# Altium PCB BACK_UP_02_10_Analizador_de_espectro.PcbDoc
Units mm, origin at the board's own origin, x right, y up, seen from the top; angles counter-clockwise.
Board outline 152.4 x 101.6 mm, 2 copper layers (Top Layer, Bottom Layer); 140 components, 98 nets, 608 pads, 72 vias.
Unrouted connection lines stored in the file: 220.
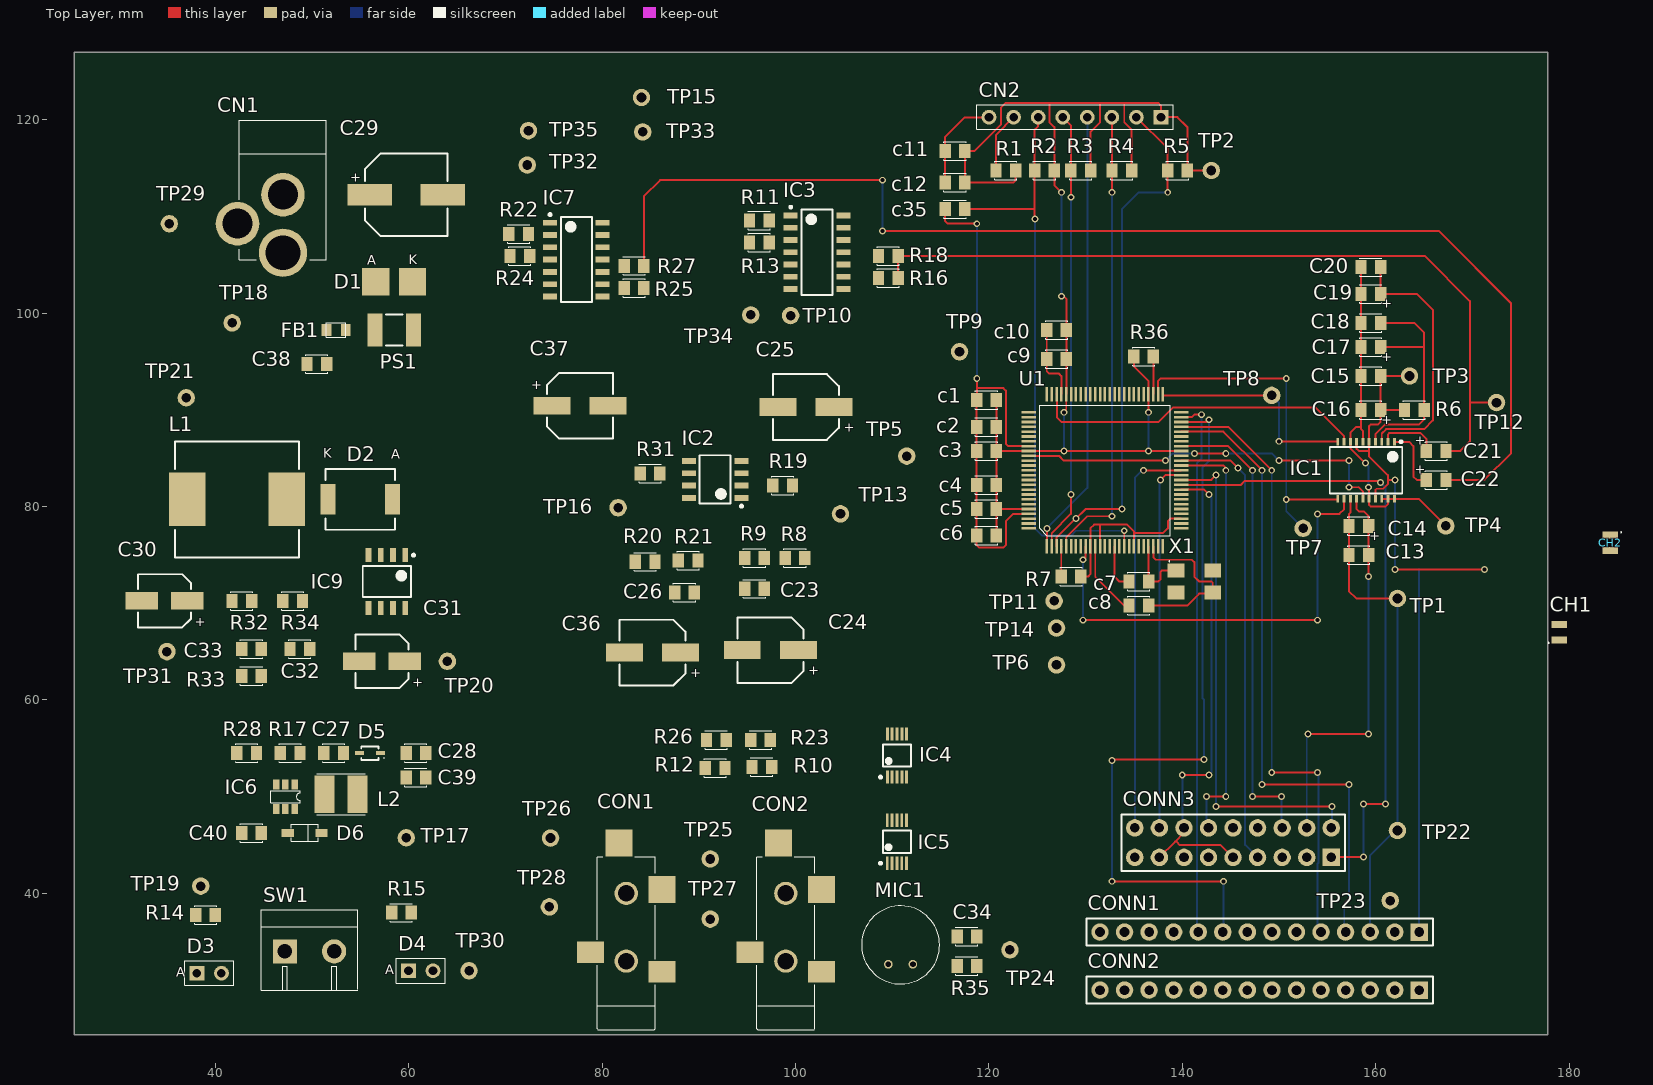
[diagram p0: Top Layer view]
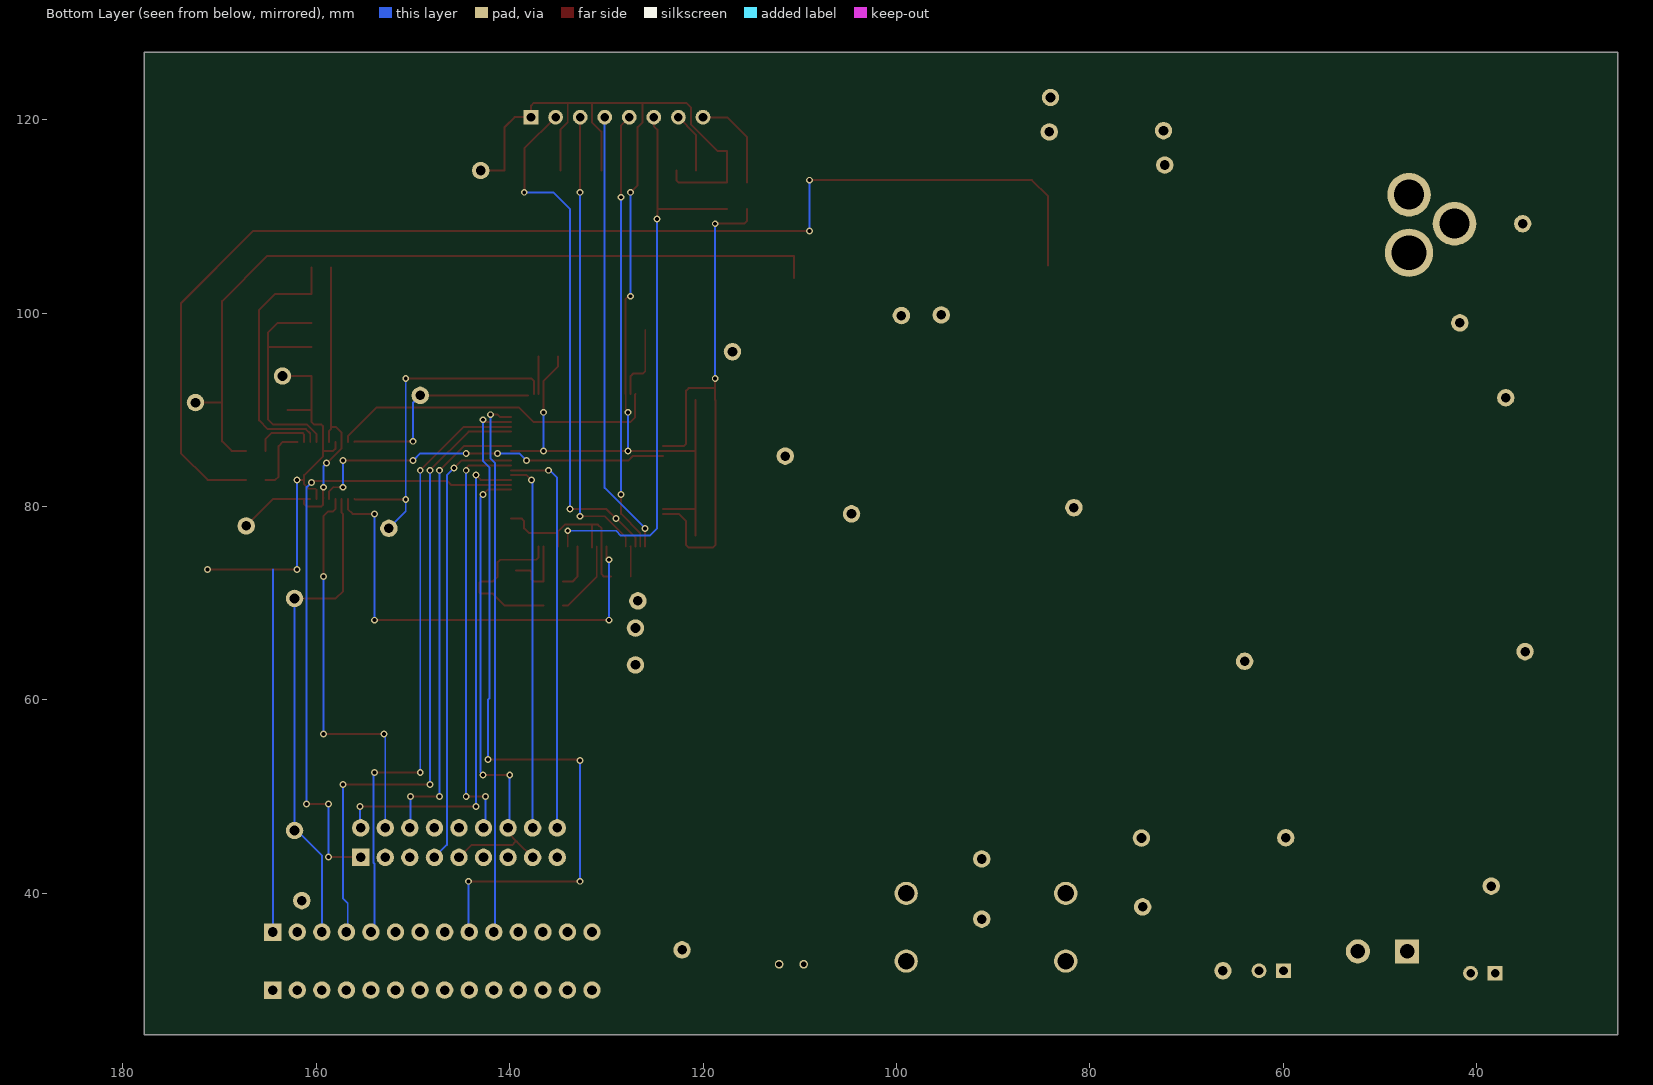
[diagram p1: Bottom Layer view, seen from below]

## Layer stack, top to bottom
Top Solder: solder mask 0.0102, Solder Resist, Dk 3.5
Top Layer: signal copper 0.0356
Dielectric 1: dielectric 0.32, FR-4, Dk 4.8
Bottom Layer: signal copper 0.0356
Bottom Solder: solder mask 0.0102, Solder Resist, Dk 3.5

## Board outline
25.4,25.4 177.8,25.4 177.8,127 25.4,127

## Design rules (kind name [scope] priority, off if disabled: settings)
Clearance [All] p1: gap=0.2
PolygonConnect [All] p1: connectstyle=Relief reliefconductorwidth=0.254 reliefentries=4 polygonreliefangle="90 Angle" airgapwidth=0.254
RoutingVias [All] p1: holewidth=0.406 width=0.711 viastyle="Through Hole" minholewidth=0.406 minwidth=0.711 maxholewidth=0.406 maxwidth=0.711
SolderMaskExpansion [All] p1: expansion=0.102
Width [All] p1: maxlimit=6.35 minlimit=0.203 preferedwidth=0.203
30 further rules are at their usual default settings.

## Classes and differential pairs
component class U_adc: C13 C14 C15 C16 C17 C18 C19 C20 C21 C22 IC1 R6 TP1 TP2 TP3 TP4 TP5 TP6 TP7 TP8 TP9 TP10
component class U_AGC: C23 C24 C25 C26 C36 C37 IC2 IC3 IC4 IC7 R8 R9 R10 R11 R12 R13 R16 R18 R19 R20 R21 R22 R23 R24 R25 R26 R27 R31 TP11 TP12 TP13 TP14 TP15 TP16 TP32 TP33 TP34 TP35
component class U_Fuente: C27 C28 C29 C30 C31 C32 C33 C38 C39 C40 CH1 CH2 CN1 D1 D2 D3 D4 D5 D6 FB1 IC6 IC9 L1 L2 PS1 R14 R15 R17 R28 R32 R33 R34 SW1 TP17 TP18 TP19 TP20 TP21 TP29 TP30 TP31
component class U_Signal_imputs: C34 CON1 CON2 IC5 MIC1 R35 TP22 TP23 TP24 TP25 TP26 TP27 TP28
component class U_uc: c1 c2 c3 c4 c5 c6 c7 c8 c9 c10 c11 c12 c35 CN2 CONN1 CONN2 CONN3 R1 R2 R3 R4 R5 R7 R36 U1 X1

## Components (designator, comment, footprint, x,y, rotation, side; value= is the part's Value field where it differs from the comment)
c1 "100nF 25V X7R Ceramic" C_0805 119.75,91 r180 top
c2 "100nF 25V X7R Ceramic" C_0805 119.75,88.25 r180 top
c3 "100nF 25V X7R Ceramic" C_0805 119.75,85.75 r180 top
c4 "100nF 25V X7R Ceramic" C_0805 119.75,82.25 r180 top
c5 "100nF 25V X7R Ceramic" C_0805 119.75,79.75 r180 top
c6 "100nF 25V X7R Ceramic" C_0805 119.75,77 r180 top
c7 "18pF 50V COG Ceramic" C_0805 135.5,72.25 r0 top
c8 "18pF 50V COG Ceramic" C_0805 135.5,69.75 r0 top
c9 "1uF 6V3 X7R Ceramic" C_0805 127,95.25 r180 top
c10 "10nF 25V X7R Ceramic" C_0805 127,98.25 r180 top
c11 "10nF 25V X7R Ceramic" C_0805 116.5,116.75 r180 top
c12 "100nF 25V X7R Ceramic" C_0805 116.5,113.5 r180 top
C13 "100nF 16V Ceramic" C_0805 158.25,75 r0 top
C14 "10uF 6V3 Tantalium" C_0805_POL 158.25,78 r180 top
C15 "100nF 16V Ceramic" C_0805 159.5,93.5 r0 top
C16 "10uF 6V3 Tantalium" C_0805_POL 159.5,90 r180 top
C17 "10uF 6V3 Tantalium" C_0805_POL 159.5,96.5 r180 top
C18 "100nF 16V Ceramic" C_0805 159.5,99 r0 top
C19 "10uF 6V3 Tantalium" C_0805_POL 159.5,102 r180 top
C20 "100nF 16V Ceramic" C_0805 159.5,104.75 r0 top
C21 "1uF 16V Tantalium" C_0805_POL 166.25,85.75 r0 top
C22 "1uF 16V Tantalium" C_0805_POL 166.25,82.75 r0 top
C23 "1uF 16V Ceramic" C_0805 95.758,71.501 r180 top
C24 "100uF 16V Elect. Alum." C_AE7066X54M 97.409,65.151 r180 top
C25 "100uF 16V Elect. Alum." C_AE7066X54M 101.092,90.297 r180 top
C26 "1uF 16V Ceramic" C_0805 88.519,71.12 r0 top
C27 "100nF 16V X7R" C_0805 52.25,54.5 r180 top
C28 "10uF 10V X7R" C_0805 60.75,54.5 r0 top
C29 "100uF 50V ElecAlum" C_AE10083X105M 59.75,112.25 r0 top
C30 "100uF 6V3 ElecAlum" C_AE6553X54M 34.75,70.25 r180 top
C31 "4.7uF 50V ElecAlum" C_AE6553X54M 57.25,64 r180 top
C32 "15nF 50V Ceramic" C_0805 48.75,65.25 r0 top
C33 "100pF 25V Ceramic" C_0805 43.75,65.25 r180 top
C34 "2.2u 6V3 X5R Ceramic" C_0805 117.729,35.56 r0 top
c35 "100nF 25V X7R Ceramic" C_0805 116.5,110.75 r180 top
C36 "100uF 16V Elect. Alum." C_AE7066X54M 85.217,64.897 r180 top
C37 "100uF 16V Elect. Alum." C_AE7066X54M 77.724,90.424 r0 top
C38 "100nF 35V Ceramic" C_0805 50.5,94.75 r180 top
C39 "10uF 10V X7R" C_0805 60.75,52 r0 top
C40 "2.2uF 50V X7R" C_0805 43.75,46.25 r0 top
CH1 "Choke" I_CHOQUE_DFN 179,67 r90 top
CH2 "Choke" I_CHOQUE_DFN 184.25,76.25 r270 top
CN1 "DC Jack" Jack_PJ002A 47,106.25 r90 top
CN2 "CONN_82" HDR_M_08P_0.1 128.905,120.269 r180 top
CON1 "AUD_IN" "AUDIO_JACK 3.5mm SMD" 82.5,36.5 r90 top
CON2 "AUD_IN" "AUDIO_JACK 3.5mm SMD" 99,36.5 r90 top
CONN1 "CON_14" "1x14x2.54 Pin Header TH V" 148,36 r180 top
CONN2 "CON_14" "1x14x2.54 Pin Header TH V" 148,30 r180 top
CONN3 "CON_18" "2x9x2.54 Pin Header TH V" 145.25,45.25 r180 top
D1 "CDBA140-G" D_DO-214AC_SCHOTTKY 58.5,103.25 r0 top
D2 "STPS3L40" D_M6959X25N 55,80.75 r180 top
D3 "LED" LED_TH 39.37,31.75 r0 top
D4 "LED" LED_TH 61.25,32 r0 top
D5 "1N4148WS" 1N4148WS 56,54.5 r180 top
D6 "MBRX160TP" SOD_123 49.25,46.25 r180 top
FB1 "Ferrite Bead" Ferrite_bead 53.5,98.25 r180 top
IC1 "PCM1802" SSOP_DB20 159,83.75 r270 top
IC2 "MCP6022" SOIC_D8 91.694,82.804 r180 top
IC3 "74LVC4066" SO14 102.235,106.299 r0 top
IC4 "TS5A23157" TSSOP50P490X110-10N 110.5,54.25 r90 top
IC5 "TS5A23157" TSSOP50P490X110-10N 110.49,45.339 r90 top
IC6 "MCP" SOT23_6P 47.25,50 r180 top
IC7 "74LVC4066" SO14 77.343,105.537 r0 top
IC9 "L5972D" SO8 57.75,72.25 r270 top
L1 "47uH" I_P128122X60N 16.5,94.5 r180 top
L2 "LQH44PN220MP0L" VLCF5028 53,50.25 r0 top
MIC1 "Mic" MIC_CMA-4544PF-W 110.871,34.671 r270 top
PS1 "Polyswitch" POLISWITCH_1 58.5,98.25 r180 top
R1 "10k 5% 1/8W" R_0805 121.75,114.75 r0 top
R2 "10k 5% 1/8W" R_0805 125.75,114.75 r0 top
R3 "10k 5% 1/8W" R_0805 129.5,114.75 r0 top
R4 "10k 5% 1/8W" R_0805 133.75,114.75 r0 top
R5 "10k 5% 1/8W" R_0805 139.5,114.75 r0 top
R6 "1k 1/8W" R_0805 164,90 r0 top
R7 "10k 5% 1/8W" R_0805 128.5,72.75 r0 top
R8 "100k 1/8W" R_0805 99.949,74.676 r0 top
R9 "100k 1/8W" R_0805 95.758,74.676 r0 top
R10 "100k 1/8W" R_0805 96.52,53.086 r180 top
R11 "590 1/8W" R_0805 96.266,109.601 r0 top
R12 "33k 1/8W" R_0805 91.694,52.959 r180 top
R13 "2k2 1/8W" R_0805 96.266,107.315 r0 top
R14 "Res1" R_0805 39,37.75 r180 top
R15 "Res1" R_0805 59.25,38 r180 top
R16 "3k9 1/8W" R_0805 109.601,103.632 r180 top
R17 "30k9 1%" R_0805 47.75,54.5 r0 top
R18 "100k 1/8W" R_0805 109.601,105.918 r180 top
R19 "1k 1/8W" R_0805 98.679,82.169 r0 top
R20 "100k 1/8W" R_0805 84.455,74.295 r180 top
R21 "100k 1/8W" R_0805 88.9,74.422 r180 top
R22 "590 1/8W" R_0805 71.374,108.204 r0 top
R23 "100k 1/8W" R_0805 96.393,55.88 r180 top
R24 "2k2 1/8W" R_0805 71.501,105.918 r0 top
R25 "3k9 1/8W" R_0805 83.312,102.616 r180 top
R26 "33k 1/8W" R_0805 91.821,55.88 r180 top
R27 "100k 1/8W" R_0805 83.312,104.902 r180 top
R28 "30k9 1%" R_0805 43.25,54.5 r0 top
R31 "1k 1/8W" R_0805 84.963,83.439 r180 top
R32 "8k2 1/4W" R_0805 42.75,70.25 r0 top
R33 "10k 1/4W" R_0805 43.75,62.5 r0 top
R34 "5k1 1/4W" R_0805 48,70.25 r180 top
R35 "2k2 1/8W" R_0805 117.729,32.512 r0 top
R36 "10k 5% 1/8W" R_0805 136,95.5 r180 top
SW1 "Switch" BORNERA_2X5MM 49.75,34 r180 top
TP1 "TP" TP 162.25,70.5 r0 top
TP2 "TP" TP 143,114.75 r0 top
TP3 "TP" TP 163.5,93.5 r0 top
TP4 "TP" TP 167.25,78 r0 top
TP5 "TP" TP 111.506,85.217 r0 top
TP6 "TP" TP 127,63.627 r0 top
TP7 "TP" TP 152.5,77.75 r0 top
TP8 "TP" TP 149.25,91.5 r0 top
TP9 "TP" TP 116.967,96.012 r0 top
TP10 "TP" TP 99.5,99.75 r90 top
TP11 "TP" TP 126.75,70.25 r0 top
TP12 "TP" TP 172.5,90.75 r90 top
TP13 "TP" TP 104.648,79.248 r90 top
TP14 "TP" TP 127,67.437 r90 top
TP15 "TP" TP 84.074,122.301 r90 top
TP16 "TP" TP 81.661,79.883 r90 top
TP17 "TP" TP 59.75,45.75 r90 top
TP18 "TP" TP 41.75,99 r90 top
TP19 "TP" TP 38.5,40.75 r90 top
TP20 "TP" TP 64,64 r90 top
TP21 "TP" TP 37,91.25 r0 top
TP22 "TP" TP 162.25,46.5 r90 top
TP23 "TP" TP 161.5,39.25 r90 top
TP24 "TP" TP 122.174,34.163 r90 top
TP25 "TP" TP 91.186,43.561 r90 top
TP26 "TP" TP 74.676,45.72 r90 top
TP27 "TP" TP 91.186,37.338 r90 top
TP28 "TP" TP 74.549,38.608 r90 top
TP29 "TP" TP 35.25,109.25 r90 top
TP30 "TP" TP 66.25,32 r90 top
TP31 "TP" TP 35,65 r0 top
TP32 "TP" TP 72.263,115.316 r90 top
TP33 "TP" TP 84.201,118.745 r90 top
TP34 "TP" TP 95.377,99.822 r90 top
TP35 "TP" TP 72.39,118.872 r90 top
U1 "LPC1769FBD100" LQFP100 132,83.75 r0 top
X1 "XTAL_HF" ABMC_XTAL 141.25,72.25 r0 top

## Footprints (in the part's own frame and the unit in brackets; to place one, negate y for a bottom-side part, rotate by r counter-clockwise, add the part's x,y. Pads: shape width x height; smd on the part's side, far side on the other; paste and mask are expansions set on the pad)
1N4148WS [mm] "SODFL, 2-Leads, Body 1.25x2.50mm, IPC Medium Density"
  rect 0.95x0.4 smd: 1(-1.075,0) 2(1.075,0)
  silkscreen extent -1.5,-0.7 0.9,0.7, body extent -0.9,-0.67 0.9,0.67, height 0.9
"1x14x2.54 Pin Header TH V" [mm] "1x14x2.54 Pin Header TH V"
  rect 1.8x1.8 hole 1: 1(-16.51,0)
  round 1.8 hole 1: 2(-13.97,0) 3(-11.43,0) 4(-8.89,0) 5(-6.35,0) 6(-3.81,0) 7(-1.27,0) 8(1.27,0) 9(3.81,0) 10(6.35,0) 11(8.89,0) 12(11.43,0) 13(13.97,0) 14(16.51,0)
  silkscreen extent -17.91,-1.4 17.91,1.4
"2x9x2.54 Pin Header TH V" [mm] "2x9x2.54 Pin Header TH V"
  rect 1.8x1.8 hole 1: 1(-10.16,1.524)
  round 1.8 hole 1: 2(-7.62,1.524) 3(-5.08,1.524) 4(-2.54,1.524) 5(0,1.524) 6(2.54,1.524) 7(5.08,1.524) 8(7.62,1.524) 9(10.16,1.524) 10(-10.16,-1.524) 11(-7.62,-1.524) 12(-5.08,-1.524) 13(-2.54,-1.524) 14(0,-1.524) 15(2.54,-1.524) 16(5.08,-1.524) 17(7.62,-1.524) 18(10.16,-1.524)
  silkscreen extent -11.56,-2.92 11.56,2.92
ABMC_XTAL [mm] "ABM3C-12.000MHZ-D4Y-T"
  rect 1.75x1.45 smd: 1(-1.9,1.15) 2(-1.9,-1.15) 3(1.9,-1.15) 4(1.9,1.15)
  silkscreen extent -2.62,2.03 -2.53,2.12, body extent -2.58,-1.68 2.57,1.68, height 1.3
"AUDIO_JACK 3.5mm SMD" [mm] "SJ-3524-SMT"
  rect 2.8x2.8 smd: 1(3.9,-3.7) 2(8.7,0.75)
  rect 2.2x2.8 smd: 3(-2.6,3.7) 4(-4.6,-3.7)
  round 2.4 hole 1.7: ""(-3.5,0) ""(3.5,0)
  silkscreen extent -10.6,-3 7.3,3
BORNERA_2X5MM [mm]
  rect 2.5x2.5 hole 1.5: 1(2.54,0)
  round 2.5 hole 1.5: 2(-2.54,0)
  silkscreen extent -5,-4.3 5,4
C_0805 [mm]
  rect 0.5x1.25 on Mech3: 0(-0.75,0) 0(0.75,0)
  rect 1.175x1.45 smd: 1(-1.016,0) 2(1.016,0)
  silkscreen extent -1.14,-0.95 1.14,0.95
C_0805_POL [mm]
  rect 0.5x1.25 on Mech3: 0(-0.75,0) 0(0.75,0)
  rect 1.175x1.45 smd: 1(-1.016,0) 2(1.016,0)
  silkscreen extent -1.14,-0.95 1.14,0.95
C_AE6553X54M [mm] "Aluminum Electrolytic Capacitor, 4.7uF, 50V"
  rect 3.35x1.8 smd: 1(-2.35,0) 2(2.35,0)
  silkscreen extent -2.75,-2.75 2.75,2.75, body extent -2.75,-2.75 2.75,2.75, height 5.4
C_AE7066X54M [mm] "Aluminum Electrolytic Capacitor, 100uF, 16V"
  rect 3.8x1.85 smd: 1(-2.9,0) 2(2.9,0)
  silkscreen extent -3.4,-3.4 3.4,3.4, body extent -3.4,-3.4 3.4,3.4, height 5.4
C_AE10083X105M [mm] "Aluminum Electrolytic Capacitor, 100uF, 50V"
  rect 4.6x2.25 smd: 1(-3.775,0) 2(3.775,0)
  silkscreen extent -4.25,-4.25 4.25,4.25, body extent -4.25,-4.25 4.25,4.25, height 10.5
D_DO-214AC_SCHOTTKY [mm] "CDBA140-G"
  rect 2.8x2.8 smd: 1(-1.9,0) 2(1.9,0)
  body extent -2.25,-1.4 2.25,1.39, height 2.29
D_M6959X25N [mm] "Diodo STPS3L40-Y"
  rect 1.54x3.14 smd: 1(-3.325,0) 2(3.325,0)
  silkscreen extent -3.6,-3.15 3.6,3.15, body extent -3.57,-3.13 3.57,3.13, height 2.45
Ferrite_bead [mm]
  rect 1x1.25 smd: 1(0,0) 2(2,0)
  silkscreen extent 0,-0.75 2,0.75
HDR_M_08P_0.1 [mil]
  rect 60x60 hole 35: 1(-350,0)
  round 60 hole 35: 2(-250,0) 3(-150,0) 4(-50,0) 5(50,0) 6(150,0) 7(250,0) 8(350,0)
  silkscreen extent -400,-50 400,50
I_CHOQUE_DFN [mm] "Chip Power Inductor BRC2012T2R2MD"
  rect 0.75x1.6 smd: 1(-0.8,0) 2(0.8,0)
  silkscreen extent -1.15,1.07 -1.05,1.17, body extent -1.1,-0.72 1.1,0.72, height 1.4
I_P128122X60N [mm] "Inductor SMD 744771147"
  rect 3.8x5.5 smd: 1(-30.9,13.75) 2(-20.6,13.75)
  silkscreen extent -32.15,7.75 -19.35,19.75, body extent -32.15,7.75 -19.35,19.75, height 6
Jack_PJ002A [mm]
  round 5 hole 3.6: 1(0,0)
  round 4.5 hole 3.1: 2(6,0) 3(3,4.7)
  silkscreen extent -0.75,-4.5 13.7,4.5
LED_TH [mil]
  rect 60x60 hole 35 paste+0: 1(-50,0)
  round 60 hole 35 paste+0: 2(50,0)
  silkscreen extent -100,-50 100,50
LQFP100 [mm]
  rect 0.27x1.5 smd: 1(-6,-7.875) 2(-5.5,-7.875) 3(-5,-7.875) 4(-4.5,-7.875) 5(-4,-7.875) 6(-3.5,-7.875) 7(-3,-7.875) 8(-2.5,-7.875) 9(-2,-7.875) 10(-1.5,-7.875) 11(-1,-7.875) 12(-0.5,-7.875) 13(0,-7.875) 14(0.5,-7.875) 15(1,-7.875) 16(1.5,-7.875) 17(2,-7.875) 18(2.5,-7.875) 19(3,-7.875) 20(3.5,-7.875) 21(4,-7.875) 22(4.5,-7.875) 23(5,-7.875) 24(5.5,-7.875) 25(6,-7.875) 51(6,7.875) 52(5.5,7.875) 53(5,7.875) 54(4.5,7.875) 55(4,7.875) 56(3.5,7.875) 57(3,7.875) 58(2.5,7.875) 59(2,7.875) 60(1.5,7.875) 61(1,7.875) 62(0.5,7.875) 63(0,7.875) 64(-0.5,7.875) 65(-1,7.875) 66(-1.5,7.875) 67(-2,7.875) 68(-2.5,7.875) 69(-3,7.875) 70(-3.5,7.875) 71(-4,7.875) 72(-4.5,7.875) 73(-5,7.875) 74(-5.5,7.875) 75(-6,7.875)
  rect 1.5x0.27 smd: 26(7.875,-6) 27(7.875,-5.5) 28(7.875,-5) 29(7.875,-4.5) 30(7.875,-4) 31(7.875,-3.5) 32(7.875,-3) 33(7.875,-2.5) 34(7.875,-2) 35(7.875,-1.5) 36(7.875,-1) 37(7.875,-0.5) 38(7.875,0) 39(7.875,0.5) 40(7.875,1) 41(7.875,1.5) 42(7.875,2) 43(7.875,2.5) 44(7.875,3) 45(7.875,3.5) 46(7.875,4) 47(7.875,4.5) 48(7.875,5) 49(7.875,5.5) 50(7.875,6) 76(-7.875,6) 77(-7.875,5.5) 78(-7.875,5) 79(-7.875,4.5) 80(-7.875,4) 81(-7.875,3.5) 82(-7.875,3) 83(-7.875,2.5) 84(-7.875,2) 85(-7.875,1.5) 86(-7.875,1) 87(-7.875,0.5) 88(-7.875,0) 89(-7.875,-0.5) 90(-7.875,-1) 91(-7.875,-1.5) 92(-7.875,-2) 93(-7.875,-2.5) 94(-7.875,-3) 95(-7.875,-3.5) 96(-7.875,-4) 97(-7.875,-4.5) 98(-7.875,-5) 99(-7.875,-5.5) 100(-7.875,-6)
  silkscreen extent -6.75,-6.75 6.75,6.75
MIC_CMA-4544PF-W [mm] "CMA-4544PF-W"
  round 0.9 hole 0.6: 1(2,1.27) 2(2,-1.27)
  silkscreen extent -4.04,-4.03 4.04,4.04
POLISWITCH_1 [mm]
  rect 1.55x3.4 smd: 1(-2,0) 2(2,0)
  silkscreen extent -0.85,-1.6 0.85,1.6, body extent -2.42,-1.71 2.41,1.71, height 0.85
R_0805 [mm]
  rect 0.4x1.25 on Mech3: 0(-0.8,0) 0(0.8,0)
  rect 1.175x1.45 smd: 1(-1.016,0) 2(1.016,0)
  silkscreen extent -1.14,-0.95 1.14,0.95
SO8 [mm] "Switching Regulator L5972D"
  rect 1.45x0.6 smd: 1(-2.725,1.905) 2(-2.725,0.635) 3(-2.725,-0.635) 4(-2.725,-1.905) 5(2.725,-1.905) 6(2.725,-0.635) 7(2.725,0.635) 8(2.725,1.905)
  silkscreen extent -2.85,-2.5 1.6,2.88, body extent -2,-2.5 2,2.5, height 1.75
SO14 [mm] "Quad_Bilateral_Switch 74LVC4066"
  rect 1.45x0.6 smd: 1(-2.725,3.81) 2(-2.725,2.54) 3(-2.725,1.27) 4(-2.725,0) 5(-2.725,-1.27) 6(-2.725,-2.54) 7(-2.725,-3.81) 8(2.725,-3.81) 9(2.725,-2.54) 10(2.725,-1.27) 11(2.725,0) 12(2.725,1.27) 13(2.725,2.54) 14(2.725,3.81)
  silkscreen extent -2.85,-4.4 1.6,4.78, body extent -2,-4.4 2,4.4, height 1.75
SOD_123 [mm]
  rect 1.25x0.8 smd: 1(1.75,0) 2(-1.75,0)
  silkscreen extent -1.38,-0.88 1.38,0.88
SOIC_D8 [mm] "MCP6022"
  rect 1.45x0.6 smd: 1(-2.725,1.905) 2(-2.725,0.635) 3(-2.725,-0.635) 4(-2.725,-1.905) 5(2.725,-1.905) 6(2.725,-0.635) 7(2.725,0.635) 8(2.725,1.905)
  silkscreen extent -2.85,-2.5 1.6,2.88, body extent -2,-2.5 2,2.5, height 1.75
SOT23_6P [mil]
  rect 27x40 smd: 1(-37.5,-50) 2(0,-50) 3(37.5,-50) 4(37.5,50) 5(0,50) 6(-37.5,50)
  silkscreen extent -60,-25 60,25
SSOP_DB20 [mm] "PCM1802 Single-Ended Analog-Input 24-Bit"
  rect 0.75x0.3 smd: 1(-2.95,2.925) 2(-2.95,2.275) 3(-2.95,1.625) 4(-2.95,0.975) 5(-2.95,0.325) 6(-2.95,-0.325) 7(-2.95,-0.975) 8(-2.95,-1.625) 9(-2.95,-2.275) 10(-2.95,-2.925) 11(2.95,-2.925) 12(2.95,-2.275) 13(2.95,-1.625) 14(2.95,-0.975) 15(2.95,-0.325) 16(2.95,0.325) 17(2.95,0.975) 18(2.95,1.625) 19(2.95,2.275) 20(2.95,2.925)
  silkscreen extent -3.07,-3.75 2.4,3.75, body extent -2.8,-3.75 2.8,3.75, height 2
TP [mm]
  round 1.8 hole 1: 1(0,0)
TSSOP50P490X110-10N [mm] "TSSOP, 10-Leads, Body 3.00x3.00mm, Pitch 0.50mm, IPC Medium Density"
  rect 1.35x0.3 smd: 1(-2.225,1) 2(-2.225,0.5) 3(-2.225,0) 4(-2.225,-0.5) 5(-2.225,-1) 6(2.225,-1) 7(2.225,-0.5) 8(2.225,0) 9(2.225,0.5) 10(2.225,1)
  silkscreen extent -2.35,-1.45 1.15,1.82, body extent -1.55,-1.45 1.55,1.45, height 1.1
VLCF5028 [mm]
  rect 2.1x3.9 smd: 1(-1.7,0) 2(1.7,0)
  silkscreen extent -2.5,-2.12 2.5,2.12

## Part data
c1 c2 c3 c4 c5 c6 c7 c8 c9 c10 c11 c12 C13 C15 C18 C20 C23 C26 C27 C28 C32 C33 C34 c35 C38 C39 C40: library part Cap1, "Capacitor"
C14 C16 C17 C19 C21 C22 C24 C25 C29 C30 C31 C36 C37: library part Cap_Elec, "Capacitor"
CN1: library part Barrel_jack, "Connector"
CON1 CON2: library part Jack_1
CONN1 CONN2: "CONN TFT 3.5"
CONN3: "CON_TFT_2.8"
D1: library part Diodo_Schottky, "Diodo Schottky"
D2: library part DIODO, "Diode"
D5: library part DIODO, "Diode signal"
D6: library part Diodo_Schottky
IC2: library part OpAmp_Dual
IC3 IC7: library part Q_B_Switch_2
IC4 IC5: library part A_SW_2x2:1_VSSOP, "Analog Switch"
IC6: library part "Sw Source", "Switching Source"
IC9: "Fuente Switching"
L1 L2: library part Inductor, "Inductor"
MIC1: "Microfono"
PS1: library part Poliswitch, "Polishwitch"
R1 R2 R3 R4 R5 R6 R7 R8 R9 R10 R11 R12 R13 R16 R17 R18 R19 R20 R21 R22 R23 R24 R25 R26 R27 R28 R31 R32 R33 R34 R35 R36: library part Res1, "Resistor"
R14 R15: "Resistor"
SW1: library part SW
TP1 TP2 TP3 TP4 TP5 TP6 TP7 TP8 TP9 TP10 TP11 TP12 TP13 TP14 TP15 TP16 TP17 TP18 TP19 TP20 TP21 TP22 TP23 TP24 TP25 TP26 TP27 TP28 TP29 TP30 TP31 TP32 TP33 TP34 TP35: library part "Test Point", "Test Point"
U1: library part LPC1768FBD100, "CPU Cortex M3"
X1: "Crystal"

## Via types
v1: diameter 0.711, hole 0.406, Top Layer to Bottom Layer, 72 vias

## Nets (pads, with @x,y where several pads share a name; then routed paths per layer and width w, separated by ;. In a path a pad name is that pad's centre, name@x,y a point inside that pad or via, vN(x,y) a via of type N, cw(c..) or ccw(c..) an arc to the next point about the centre after c; other vN are vias at no path point)
+5V: C15.2 C16.1 C23.1 C26.1 C28.1 C39.1 CONN1.1 D5.1 IC1.5 IC1.7 IC1.17 IC2.8 IC3.14 IC7.14 L2.2 R6.1 R8.2 R17.2 R20.2 R35.2 TP3.1 TP17.1 | length 79.7
  Top Layer w0.203: IC1.7 158.025,85.975 158.25,85.75 159.325,85.75 ; IC1.17 159.975,81.725 160.093,81.843 160.772,81.843 161.25,82.321 161.25,82.75 ; v1(162,73.5) v1(171.25,73.5) ; v1(162,82.75) 161.25,82.75 ; R6.1 C16.1 ; TP3.1 C15.2 C16.1 ; C16.1 160.516,88.766 160.25,88.5 159.5,88.5 159.325,88.325 159.325,85.175 161.25,83.25 161.25,82.75
  Bottom Layer w0.203: v1(162,73.5) v1(162,82.75) ; CONN1.1@164.5,36.01 164.5,73.5
AGND: C15.1 C16.2 C17.2 C18.1 C19.2 C20.1 C23.2 C25.2 C26.2 C28.2 C37.2 C39.2 C40.2 CH1.2 CH2.1 CON1.1 CON2.1 D4.2 D6.1 IC1.6 IC1.8 IC1.16 IC1.18 IC1.19 IC1.20 IC2.4 IC3.7 IC4.3 IC6.2 IC7.7 MIC1.2 R9.1 R12.2 R21.1 R26.2 R28.1 TP4.1 TP10.1 TP30.1 | length 38.2
  Top Layer w0.203: 158.484,88.016 158.484,88.25 ; C20.1 C19.2 C18.1 C17.2 C15.1 C16.2 158.484,88.25 ; 158.5,88 158.675,87.825 IC1.6 ; v1(158.93,84.5) 157.375,86.055 157.375,87.625 158,88.25 158.484,88.25 ; v1(159.25,82) 159.325,81.925 159.325,80.175 159.5,80 161,80 161.275,80.275 IC1.19 ; IC1.18 IC1.19 ; TP4.1 164.45,80.8 IC1.19
  Bottom Layer w0.203: v1(158.93,84.5) 159.25,84.18 v1(159.25,82)
CTRL_MUX: IC5.1 IC5.5 U1.75
D/C: CONN1.11 CONN3.10 U1.36 | length 52.3
  Top Layer w0.203: U1.36 143,82.75 v1(143.5,83.25) ; v1(143.5,49) v1(155.5,49)
  Bottom Layer w0.203: v1(143.5,49) v1(143.5,83.25) ; CONN3.10 155.5,46.864 v1(155.5,49)
E1: IC3.13 IC7.13 TP32.1 U1.95
E2: IC3.5 IC7.5 TP34.1 U1.94
E3: IC3.6 IC7.6 TP33.1 U1.93
E4: IC3.12 IC7.12 TP35.1 U1.92
EARTH: C29.2 C31.2 C38.2 CH1.1 CN1.2 CN1.3 D3.2 TP29.1
GND: c1.2 c2.2 c3.2 c4.2 c5.2 c6.2 c7.1 c8.1 c9.2 c10.2 C13.1 C14.2 C30.2 C33.2 c35.2 CH2.2 CONN1.3 CONN3.13 D2.1 IC1.13 IC5.3 IC9.2 IC9.3 IC9.6 IC9.7 R33.1 R34.1 TP1.1 TP22.1 TP31.1 U1.11 U1.15 U1.31 U1.41 U1.55 U1.72 U1.83 U1.97 | length 128.6
  Top Layer w0.203: c35.2 115.484,109.516 115.75,109.25 v1(118.75,109.25) ; v1(118.75,93.25) 118.75,92.25 ; U1.97 122.5,79.25 121.75,78.5 121.75,76 121.5,75.75 119,75.75 118.734,76.016 c6.2 c5.2 c4.2 c3.2 c2.2 c1.2 118.75,91.016 118.75,92.25 ; U1.83 122,86.25 121.75,86.5 121.75,92 121.5,92.25 118.75,92.25 ; c10.2 c9.2 125.984,94.016 126.25,93.75 127.25,93.75 127.5,93.5 U1.72 ; U1.11 131,72.75 134,69.75 c8.1 ; U1.15 133,72.75 133.5,72.25 c7.1 ; IC1.13 157.375,79.375 157.25,79.25 157.25,78.016 C14.2 C13.1 157.234,71.266 158,70.5 TP1.1
  Bottom Layer w0.203: v1(118.75,93.25) v1(118.75,109.25) ; CONN1.3 159.43,43.93 162.25,46.75 162.25,70.25 TP1.1@162,70.5
GPIO0.0: CONN1.4 U1.46 | length 67
  Top Layer w0.203: U1.46 144.25,87.75 v1(148.25,83.75) ; v1(148.25,51.25) v1(157.25,51.25)
  Bottom Layer w0.203: v1(148.25,51.25) v1(148.25,83.75) ; CONN1.4 156.75,36.14 156.75,39 157.25,39.5 v1(157.25,51.25)
GPIO0.1: CONN1.5 U1.47 | length 63.9
  Top Layer w0.203: U1.47 144.75,88.25 v1(149.25,83.75) ; v1(149.25,52.5) v1(154,52.5)
  Bottom Layer w0.203: v1(149.25,52.5) v1(149.25,83.75) ; v1(154,52.5) 154.072,52.428 154.072,43.157 154,43.085 154,36.35 CONN1.5
GPIO0.4: CONN2.1 U1.81
GPIO0.5: CONN2.2 U1.80
GPIO0.6: CONN2.3 U1.79
GPIO0.15: CONN2.4 U1.62
GPIO0.16: CONN2.5 U1.63
GPIO0.17: CONN2.6 U1.61
GPIO0.18: CONN2.7 U1.60
GPIO0.19: CONN2.8 U1.59
GPIO0.20: CONN2.9 U1.58
GPIO0.21: CONN2.10 U1.57
L-CH: CON1.2 IC5.4 TP28.1
LCD_CS: CONN1.7 U1.77
LCD_RD: CONN1.10 U1.49 | length 56
  Top Layer w0.203: U1.49 141,89.25 141.25,89.5 v1(142,89.5)
  Bottom Layer w0.203: CONN1.10 141.5,36.15 141.5,84.5 142,85 v1(142,89.5)
LCD_RS: CONN1.8 U1.76
LCD_RST: CONN1.6 U1.78
LCD_WR: CONN1.9 U1.48 | length 77.3
  Top Layer w0.203: v1(132.75,41.25) v1(144.25,41.25) ; v1(132.75,53.75) 132.827,53.827 v1(142.25,53.827) ; U1.48 142.5,88.75 142.731,88.981 v1(142.769,88.981)
  Bottom Layer w0.203: v1(132.75,41.25) v1(132.75,53.75) ; v1(142.25,53.827) 142.25,60 142.093,60.157 142.093,84.054 142.769,84.731 v1(142.769,88.981) ; CONN1.9 144.25,36.06 v1(144.25,41.25)
MIC-CH: C34.2 IC5.7 IC5.9 TP24.1
MISO: CONN2.13 CONN3.2 CONN3.6 CONN3.17 U1.37 | length 39.1
  Top Layer w0.203: v1@137.5,82.75 v1(137.75,82.75) 138.25,83.25 U1.37
  Bottom Layer w0.203: CONN3.17@137.63,46.274 137.63,82.63 v1(137.75,82.75)
MOSI: CONN2.14 CONN3.3 CONN3.9 CONN3.18 U1.38 | length 42.2
  Top Layer w0.203: v1(136,83.75) 136,83.5 136.25,83.75 U1.38
  Bottom Layer w0.203: CONN3.18@135.09,46.274 135.09,83 135.84,83.75 v1(136,83.75)
Netc7_2: c7.2 U1.22 X1.1 | length 7.4
  Top Layer w0.203: U1.22@136.516,75.859 c7.2 137.5,72.25 137.75,72.5 137.75,73.25 137.9,73.4 X1.1
Netc8_2: c8.2 U1.23 X1.3 | length 17.3
  Top Layer w0.203: c8.2 140.5,69.75 141.75,71 X1.3@143.05,71 ; U1.23 137,74.75 137.25,74.5 141,74.5 141.25,74.25 141.25,72.75 141.75,72.25 143,72.25 143.15,72.1 X1.3
Netc11_2: c11.2 c12.2 CN2.8 | length 10.1
  Top Layer w0.203: c12.2 c11.2 115.484,118.234 117.5,120.25 119.996,120.25 CN2.8
NetC17_1: C17.1 C18.2 IC1.4 R6.2 | length 24.8
  Top Layer w0.203: IC1.4 159.975,87.475 161,88.5 164.5,88.5 165.016,89.016 R6.2 165.016,96.5 ; C17.1 165.016,96.5 ; C18.2 164,99 165.016,97.984 165.016,96.5
NetC19_1: C19.1 C20.2 IC1.3 | length 27
  Top Layer w0.203: C20.2 C19.1 164.25,102 165.905,100.345 165.905,88.905 165,88 161.07,88 160.625,87.555 IC1.3
NetC21_1: C21.1 IC1.2 | length 6.3
  Top Layer w0.203: IC1.2 161.275,87.475 161.397,87.597 164.653,87.597 165.25,87 165.25,85.766 C21.1
NetC22_1: C22.1 IC1.1 | length 6.8
  Top Layer w0.203: IC1.1 163.45,86.7 163.9,86.25 163.9,83.1 164.25,82.75 C22.1
NetC24_1: C24.1 IC2.3 R8.1 R9.2 TP13.1
NetC24_2: C24.2 IC4.10
NetC25_1: C25.1 R19.2
NetC27_1: C27.1 D5.2 IC6.1
NetC27_2: C27.2 D6.2 IC6.6 L2.1
NetC32_1: C32.1 C33.1 IC9.4
NetC32_2: C32.2 R33.2
NetC34_1: C34.1 MIC1.1 R35.1
Netc35_1: c35.1 CN2.6 R2.1 U1.17 | length 61.3
  Top Layer w0.203: c35.1 124.734,110.75 ; v1(124.75,109.75) 124.734,109.766 124.734,110.75 ; CN2.6 125.095,119.345 124.734,118.984 R2.1 124.734,110.75 ; U1.17 v1(134,77.5)
  Bottom Layer w0.203: v1(124.75,109.75) 124.75,77.75 125.5,77 128.5,77 129,77.5 v1(134,77.5)
NetC36_1: C36.1 IC2.5 R20.1 R21.2 TP16.1
NetC36_2: C36.2 IC4.6
NetC37_1: C37.1 R31.2
NetCN1_1: CN1.1 D1.1 TP18.1
NetCN2_2: CN2.2 R5.1 U1.3 | length 54.6
  Top Layer w0.203: U1.3 127,76.821 128.929,78.75 v1(129,78.75) 130,79.75 v1(133.75,79.75) ; CN2.2 138.484,117.04 R5.1 138.484,112.516 v1(138.5,112.5)
  Bottom Layer w0.203: v1@129,78.621 v1(129,78.75) ; v1(133.75,79.75) 133.75,110.75 135.5,112.5 v1(138.5,112.5)
NetCN2_3: CN2.3 R4.1 U1.5 | length 47.9
  Top Layer w0.203: U1.5 128,76.821 130.179,79 v1(132.75,79) ; CN2.3 132.734,120.25 R4.1 132.734,112.516 v1(132.75,112.5)
  Bottom Layer w0.203: v1(132.75,79) v1(132.75,112.5)
NetCN2_4: CN2.4 U1.1 | length 46.1
  Top Layer w0.203: U1.1 v1(126,77.75)
  Bottom Layer w0.203: v1(126,77.75) 130.175,81.925 CN2.4
NetCN2_5: CN2.5 R3.1 U1.2 | length 45.6
  Top Layer w0.203: U1.2 126.5,77.25 128.484,79.234 v1(128.484,81.266) ; CN2.5 128.484,119.42 R3.1 v1(128.484,111.984)
  Bottom Layer w0.203: v1(128.484,81.266) v1(128.484,111.984)
NetCN2_7: CN2.7 R1.1 | length 6.3
  Top Layer w0.203: R1.1 120.734,118.414 121.653,119.333 121.653,119.367 CN2.7
NetD1_2: D1.2 PS1.1
NetD2_2: D2.2 IC9.1 L1.1
NetD3_1: D3.1 R14.2
NetD4_1: D4.1 R15.1
NetFB1_1: FB1.1 PS1.2
NetIC1_9: IC1.9 TP9.1 U1.73 | length 34.7
  Top Layer w0.203: U1.73 127.063,91.562 127.063,89.187 127.5,88.75 137.563,88.75 139.063,90.25 153.75,90.25 156.725,87.275 IC1.9
NetIC1_10: IC1.10 TP8.1 U1.51 | length 22.4
  Top Layer w0.203: U1.51@138.125,91.5 TP8.1 ; v1(150,86.75) IC1.10@156.025,86.75 ; IC1.10@156.025,86.75 IC1.10 IC1.10@156.025,86.75
  Bottom Layer w0.203: TP8.1 150,90.75 v1(150,86.75)
NetIC1_11: IC1.11 TP7.1 U1.52 | length 36.3
  Top Layer w0.203: U1.52 137.5,93 137.75,93.25 v1(150.75,93.25) ; v1(150.75,80.75) 156.025,80.75 IC1.11
  Bottom Layer w0.203: v1(150.75,93.25) v1(150.75,80.75) 150.75,79.5 TP7.1
NetIC1_12: IC1.12 TP6.1 U1.9 | length 47
  Top Layer w0.203: v1(129.75,68.25) v1(154,68.25) ; v1(129.75,74.5) 130,74.75 U1.9 ; v1(154,79.25) 156.25,79.25 156.725,79.725 IC1.12
  Bottom Layer w0.203: v1(129.75,68.25) v1(129.75,74.5) ; v1(154,68.25) v1(154,79.25)
NetIC1_15: IC1.15 TP5.1 U1.85 | length 39.8
  Top Layer w0.203: U1.85 127.25,85.25 127.75,84.75 v1(138.25,84.75) ; v1(141.25,85.5) v1(144.5,85.5) ; v1(150,84.75) 157,84.75 157.25,85 v1@157.5,84.75 ; v1(157.25,82) 158.249,82 158.675,81.575 IC1.15 ; v1@157.25,84.5 v1(157.25,84.75)
  Bottom Layer w0.203: v1(138.25,84.75) 139,85.5 v1(141.25,85.5) ; v1(144.5,85.5) 149.25,85.5 v1(150,84.75) ; v1(157.25,82) v1(157.25,84.75)
NetIC3_2: IC3.2 R11.2
NetIC3_3: IC3.3 R13.2
NetIC3_9: IC3.9 R16.2
NetIC3_10: IC3.10 R18.2
NetIC4_1: IC4.1 U1.91
NetIC4_5: IC4.5 U1.90
NetIC4_7: IC4.7 R23.2 R26.1 TP14.1 U1.7
NetIC4_9: IC4.9 R10.2 R12.1 TP11.1 U1.6
NetIC6_3: IC6.3 R17.1 R28.2
NetIC7_2: IC7.2 R22.2
NetIC7_3: IC7.3 R24.2
NetIC7_9: IC7.9 R25.2
NetIC7_10: IC7.10 R27.2
NetIC9_5: IC9.5 R32.2 R34.2
NetR7_1: R7.1 U1.4 | length 3.1
  Top Layer w0.203: R7.1 127.484,75.859 U1.4
NetR36_1: R36.1 U1.53 | length 3.9
  Top Layer w0.203: U1.53@137.016,91.641 R36.1
NetX1_2: X1.2 X1.4
R-CH: CON1.3 IC5.2 TP26.1
R_SW_A_1: IC2.2 IC3.1 IC3.4 IC3.8 IC3.11 R19.1
R_SW_A_2: IC2.6 IC7.1 IC7.4 IC7.8 IC7.11 R31.1
R_SW_B_1: C21.2 IC2.1 R11.1 R13.1 R16.1 R18.1 TP12.1 | length 83.5
  Top Layer w0.203: R16.1 R18.1 165.082,105.918 169.75,101.25 169.75,94.5 169.75,90.75 ; C21.2 168.75,85.75 169.75,86.75 169.75,90.75 ; TP12.1 169.75,90.75
R_SW_B_2: C22.2 IC2.7 R22.1 R24.1 R25.1 R27.1 TP15.1 | length 129.3
  Top Layer w0.203: R27.1 84.328,112.078 86,113.75 v1(109,113.75) ; v1(109,108.5) 166.5,108.5 174,101 174,85.5 171.25,82.75 C22.2
  Bottom Layer w0.203: v1(109,108.5) v1(109,113.75)
SCK: CONN2.11 CONN3.5 CONN3.8 CONN3.16 U1.34 | length 51.4
  Top Layer w0.203: CONN3.8 139.25,45.346 ; U1.34 141.75,81.75 142.25,81.75 v1(142.75,81.25) ; v1(140,52.25) v1(142.75,52.25) ; CONN3.16 140.17,46.266 139.25,45.346 ; CONN3.5 143.976,45 139.75,45 139.404,45.346 139.25,45.346
  Bottom Layer w0.203: v1(140,52.25) 140,46.944 CONN3.16 ; v1(142.75,52.25) 143,52.5 143,81 v1(142.75,81.25)
SD_CS: CONN2.12 CONN3.15 U1.39 | length 44.3
  Top Layer w0.203: U1.39 144.25,84.25 144.5,84 v1(144.5,83.75) ; CONN3.15@142.5,46.984 CONN3.15 ; v1(142.5,50) v1(144.5,50)
  Bottom Layer w0.203: v1(142.5,50) 142.5,46.984 CONN3.15 ; v1(144.5,50) v1(144.5,83.75)
SSEL: CONN1.12 CONN3.1 U1.35 | length 65.5
  Top Layer w0.203: U1.35 146.071,82.25 146.478,82.657 160.343,82.657 v1(160.5,82.5) ; CONN3.1 155.434,43.75 v1(158.75,43.75) ; v1(158.75,49.25) v1(161,49.25)
  Bottom Layer w0.203: v1(158.75,43.75) v1(158.75,49.25) ; v1@160.643,82.5 v1(160.5,82.5) 160.95,82.05 ; v1(161,49.25) 161,82.05
T_CS: CONN1.13 CONN3.4 U1.40 | length 47.3
  Top Layer w0.203: U1.40 145,84.75 v1(145.75,84)
  Bottom Layer w0.203: v1(145.75,84) 146.5,83.25 146.5,45.016 CONN3.4
T_IRQ: CONN1.14 CONN3.12 U1.43 | length 48.4
  Top Layer w0.203: U1.43 144.75,86.25 v1(147.25,83.75) ; v1(147.25,50) v1(150.25,50)
  Bottom Layer w0.203: v1(147.25,50) v1(147.25,83.75) ; v1(150.25,50) 150.25,46.854 CONN3.12
VCC: c1.1 c2.1 c3.1 c4.1 c5.1 c6.1 c9.1 c10.1 c11.1 c12.1 C13.2 C14.1 C30.1 CN2.1 CONN1.2 CONN3.7 CONN3.11 CONN3.14 IC1.14 IC4.8 IC5.8 L1.2 R1.2 R2.2 R3.2 R4.2 R5.2 R7.2 R32.1 R36.2 TP2.1 TP21.1 TP23.1 U1.10 U1.12 U1.19 U1.28 U1.42 U1.54 U1.71 U1.84 U1.96 | length 205.2
  Top Layer w0.203: c6.1 c5.1 ; c1.1 c2.1 c3.1 ; R1.2 122.766,113.766 122.5,113.5 c12.1 c11.1 118.5,116.75 121.25,119.5 121.25,121.25 121.75,121.75 126.25,121.75 ; U1.96 c5.1 ; v1(127.5,101.75) 127.75,101.75 128.016,101.484 c10.1 c9.1 U1.71@128.016,91.641 ; v1(127.5,112.5) 126.766,113.234 R2.2 126.766,119.234 126.25,119.75 126.25,121.75 ; v1(127.75,89.75) 128,90 U1.71 ; R7.2 130.25,72.75 130.5,73 U1.10 130.5,77.75 130.875,78.125 ; R3.2 130.516,118.766 131.5,119.75 131.5,121.75 ; 130.907,78.157 131.5,78.157 ; U1.12@131.5,75.75 U1.12 131.5,78.157 ; R4.2 134.766,118.984 134,119.75 134,121.75 ; R36.2 134.984,94.516 136.5,93 U1.54 v1(136.5,89.75) ; U1.19 135,77.25 ; U1.28 138.75,78.75 138.5,78.5 138.5,77.75 138,77.25 135,77.25 ; U1.42 v1(136.5,85.75) v1(127.75,85.75) U1.84 c3.1 ; TP2.1 R5.2 140.516,119.253 139.5,120.269 CN2.1 137.795,121.455 137.5,121.75 134,121.75 ; v1(153,56.5) v1(159.25,56.5) ; IC1.14 158.025,79.725 158.25,79.5 158.75,79.5 159.266,78.984 C14.1 C13.2 159.266,72.766 v1(159.25,72.75) ; c5.1 c3.1 ; 126.25,121.75 131.5,121.75 ; 131.5,78.157 134.272,78.157 135,77.429 135,77.25 ; 131.5,121.75 134,121.75
  Bottom Layer w0.203: v1(127.5,101.75) v1(127.5,112.5) ; v1(127.75,85.75) v1@127.75,89.75 ; v1(136.5,85.75) v1(136.5,89.75) ; CONN3.11@152.87,46.274 CONN3.11 152.87,56.37 v1(153,56.5) ; v1(159.25,56.5) v1(159.25,72.75)
VIN: C31.1 C40.1 IC6.4 IC6.5 IC9.8 R15.2 SW1.2 TP20.1
VIN_SW: C29.1 C38.1 FB1.2 R14.1 SW1.1 TP19.1
VINL: CON2.2 IC4.4 IC5.6 R23.1 TP27.1
VINR: CON2.3 IC4.2 IC5.10 R10.1 TP25.1
pads on no net: c1.0 c2.0 c3.0 c4.0 c5.0 c6.0 c7.0 c8.0 c9.0 c10.0 c11.0 c12.0 C13.0 C14.0 C15.0 C16.0 C17.0 C18.0 C19.0 C20.0 C21.0 C22.0 C23.0 C26.0 C27.0 C28.0 C32.0 C33.0 C34.0 c35.0 C38.0 C39.0 C40.0 CON1. CON1.4 CON2. CON2.4 R1.0 R2.0 R3.0 R4.0 R5.0 R6.0 R7.0 R8.0 R9.0 R10.0 R11.0 R12.0 R13.0 R14.0 R15.0 R16.0 R17.0 R18.0 R19.0 R20.0 R21.0 R22.0 R23.0 R24.0 R25.0 R26.0 R27.0 R28.0 R31.0 R32.0 R33.0 R34.0 R35.0 R36.0 U1.8 U1.13 U1.14 U1.16 U1.18 U1.20 U1.21 U1.24 U1.25 U1.26 U1.27 U1.29 U1.30 U1.32 U1.33 U1.44 U1.45 U1.50 U1.56 U1.64 U1.65 U1.66 U1.67 U1.68 U1.69 U1.70 U1.74 U1.82 U1.86 U1.87 U1.88 U1.89 U1.98 U1.99 U1.100

## Text inside footprints (layer, text, board x,y; h text height)
C14: Top Overlay "+" at 160.485,77.365 h1 r180
C16: Top Overlay "+" at 161.735,89.365 h1 r180
C17: Top Overlay "+" at 161.735,95.865 h1 r180
C19: Top Overlay "+" at 161.735,101.365 h1 r180
C21: Top Overlay "+" at 164.015,86.385 h1
C22: Top Overlay "+" at 164.015,83.385 h1
C24: Top Overlay "+" at 102.438,63.424 h1 r180
C25: Top Overlay "+" at 106.121,88.57 h1 r180
C29: Top Overlay "+" at 53.959,113.571 h1
C30: Top Overlay "+" at 38.992,68.447 h1 r180
C31: Top Overlay "+" at 61.492,62.197 h1 r180
C36: Top Overlay "+" at 90.246,63.17 h1 r180
C37: Top Overlay "+" at 72.695,92.151 h1
D1: Top Overlay "K" at 60.024,105.053 h1; Top Overlay "A" at 55.706,105.028 h1
D2: Top Overlay "K" at 51.19,85.068 h1; Top Overlay "A" at 58.175,84.941 h1
D3: Top Overlay "A" at 35.941,31.369 h1
D4: Top Overlay "A" at 57.567,31.619 h1